# Allegro board 2019-09-21.brd
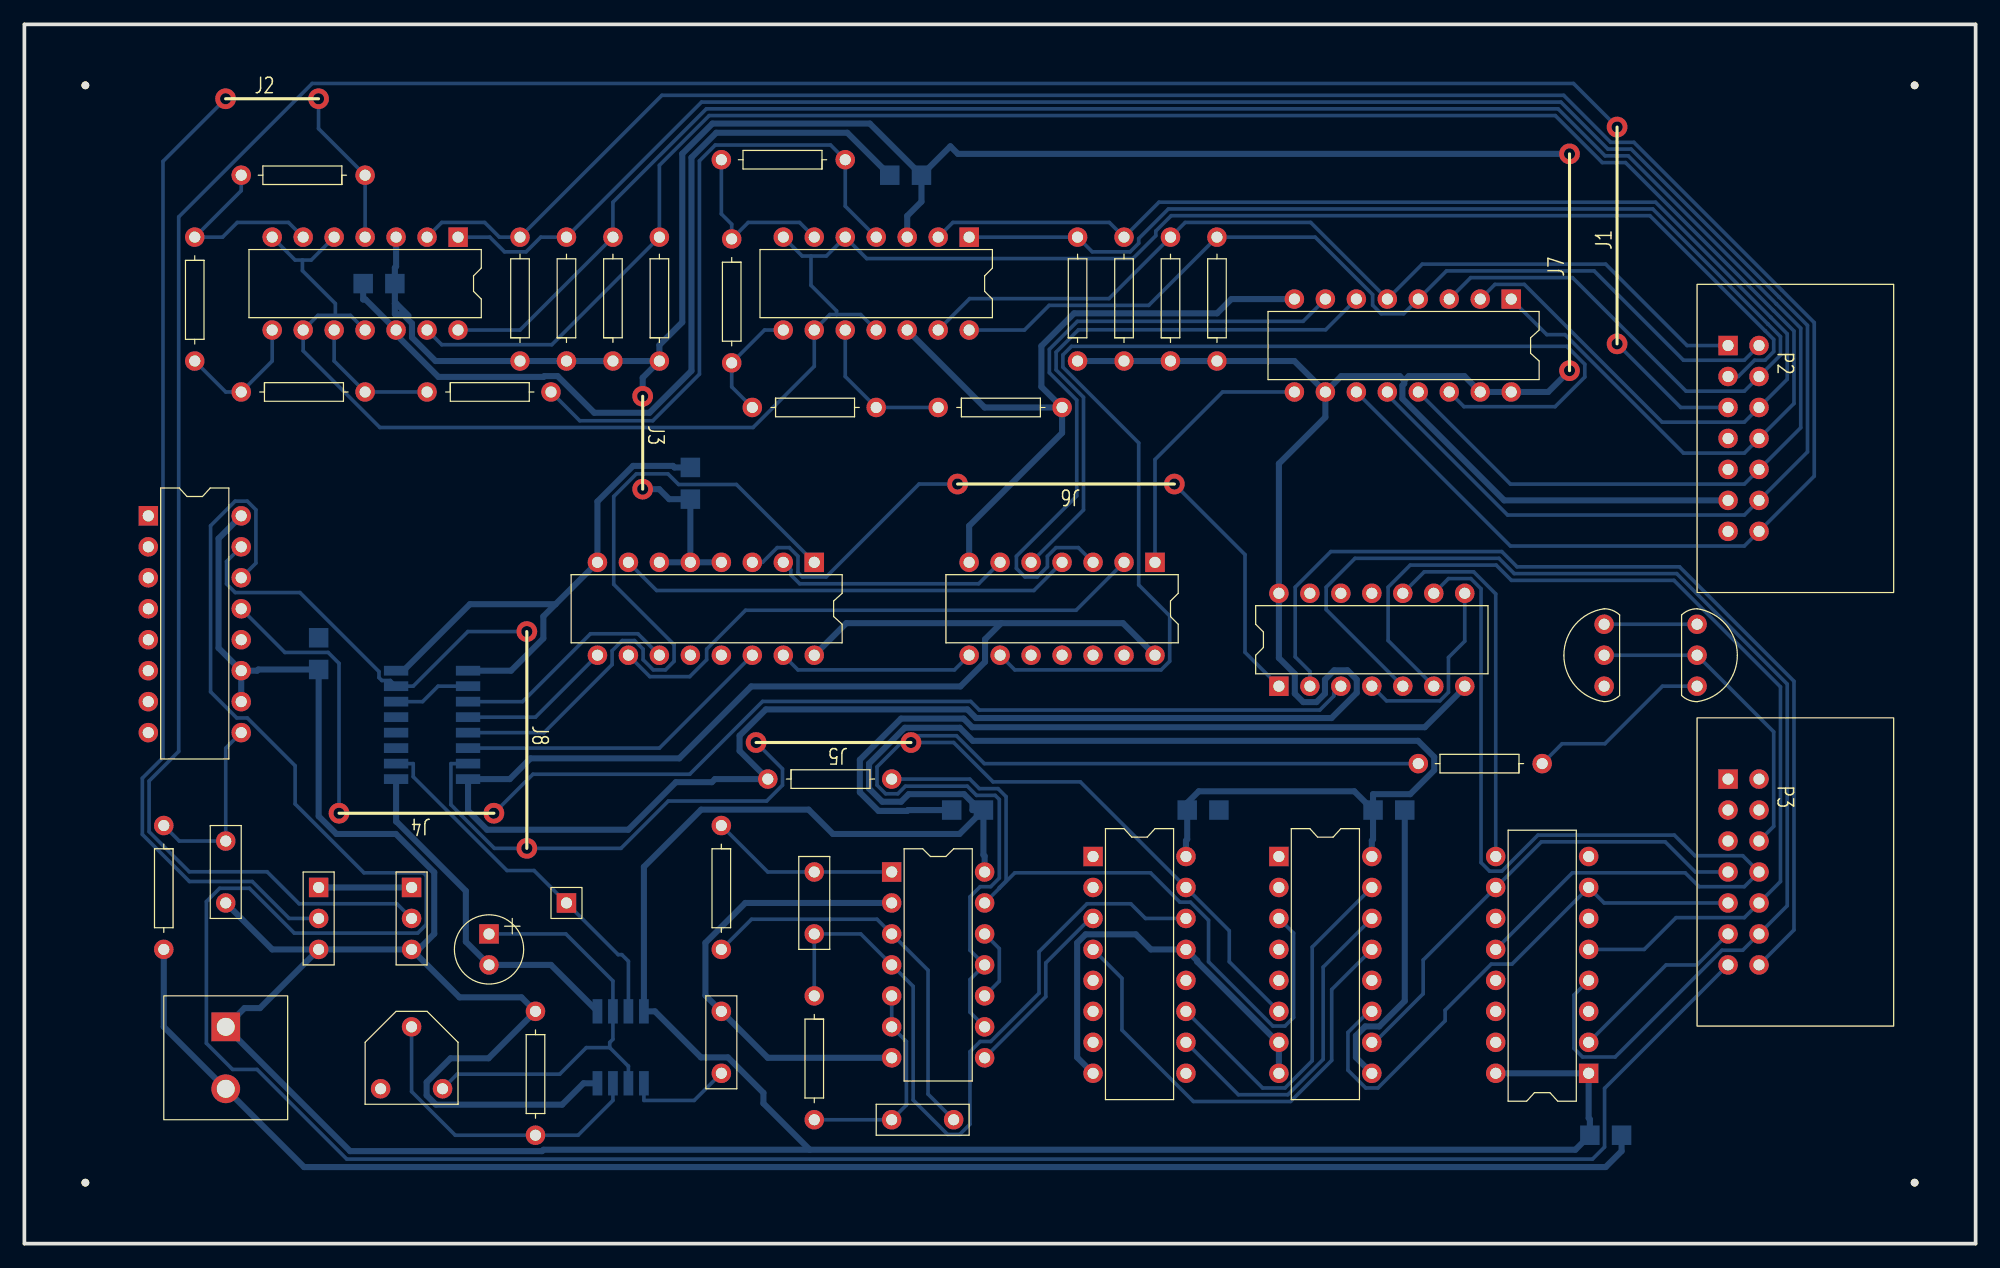
[diagram p0: board, top side]
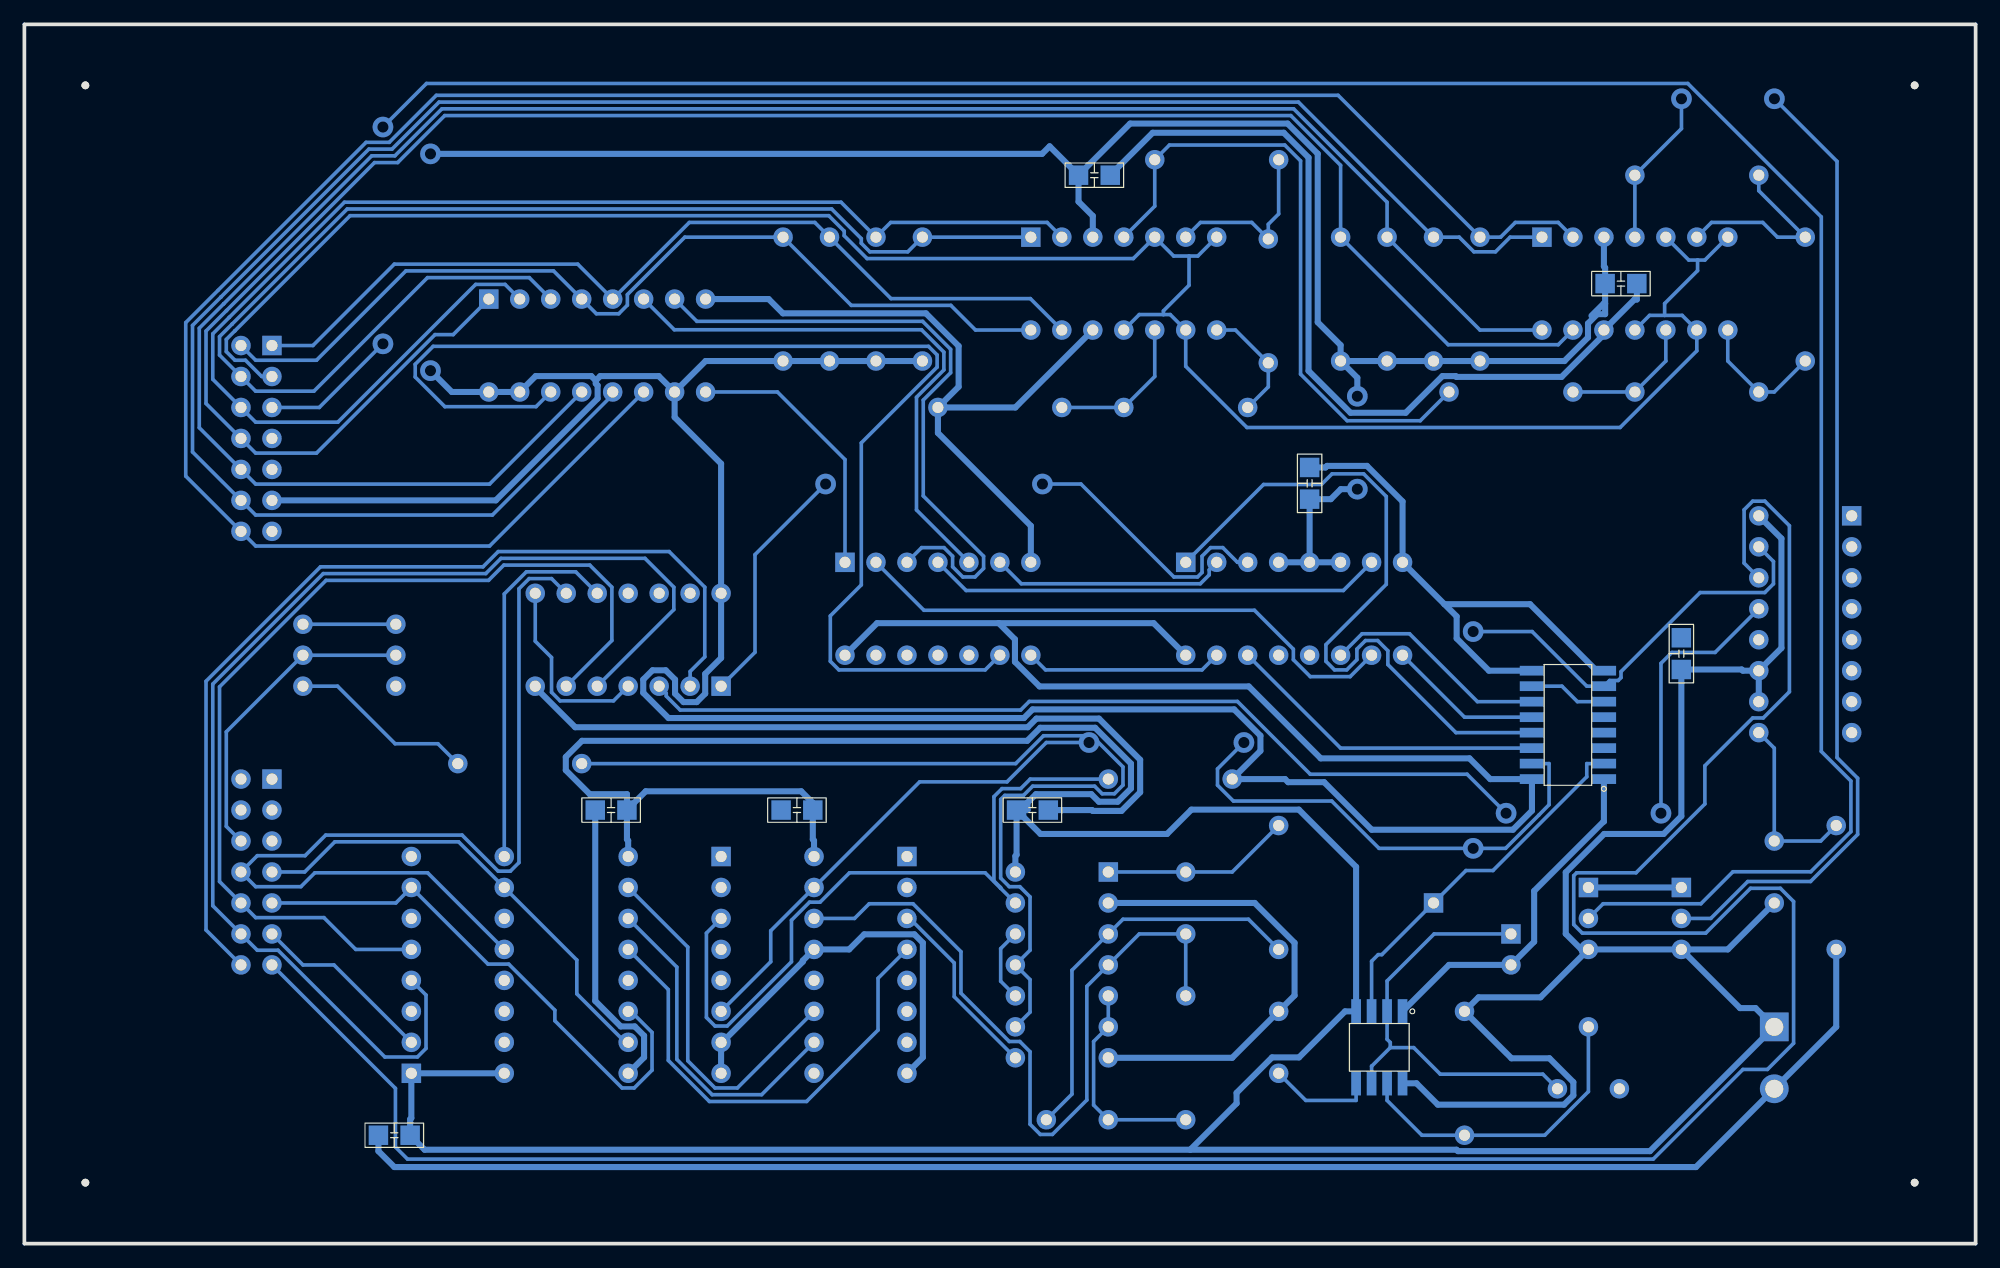
[diagram p1: board, bottom side, seen from below]

Outline 160 x 100 mm; copper layers: TOP, BOTTOM. Coordinates in mm from the lower left corner of the outline.
Outline path: 0,100 0,0 160,0 160,100 0,100

## Design rules (mm)
nets with their own width: min track width 0.5; nets +5V GND

## Placement (name value [footprint] x y rotation side)
C1  10uF  [CAP196]  38.1 25.4 0 top
C2  0.1uF  [CAP300]  57.15 13.97 90 top
C3  0.1uF  [CAP300]  16.51 27.94 90 top
C4  0.01uF  [CAP300]  64.77 30.48 270 top
C5  0.01uF  [CAP300]  76.2 10.16 180 top
C6  0.1uF  [SMDCAP]  73.66 87.63 180 bottom
C7  0.1uF  [SMDCAP]  30.48 78.74 180 bottom
C8  0.1uF  [SMDCAP]  54.61 60.96 90 bottom
C9  0.1uF  [SMDCAP]  24.13 46.99 90 bottom
C10  0.1uF  [SMDCAP]  78.74 35.56 180 bottom
C11  0.1uF  [SMDCAP]  95.25 35.56 0 bottom
C12  0.1uF  [SMDCAP]  110.49 35.56 0 bottom
C13  0.1uF  [SMDCAP]  128.27 8.89 0 bottom
J1  -  [JUMPER6]  130.6 73.8 270 bottom
J2  -  [JUMPER2]  16.5 93.9 180 bottom
J3  -  [JUMPER2]  50.7 69.5 90 bottom
J4  -  [JUMPER4]  38.5 35.3 0 bottom
J5  -  [JUMPER4]  72.7 41.1 0 bottom
J6  -  [JUMPER6]  94.3 62.3 0 bottom
J7  -  [JUMPER6]  126.7 71.6 270 bottom
J8  -  [JUMPER6]  41.2 50.2 90 bottom
NOREF  -  [unnamed]  155 95 0 top
NOREF#2  -  [unnamed]  155 5 0 top
NOREF#3  -  [unnamed]  5 95 0 top
NOREF#4  -  [unnamed]  5 5 0 top
P1  CON2  [POWER2]  16.51 17.78 270 top
P2  CON14  [JUMPER14]  139.7 73.66 270 top
P3  CON14  [JUMPER14]  139.7 38.1 270 top
Q1  2SC1815  [TO92]  137.16 50.8 270 top
Q2  2SC1815  [TO92]  129.54 45.72 90 top
R1  10K  [RES400]  41.91 19.05 180 top
R2  10K  [RES400]  27.94 87.63 90 top
R3  10K  [RES400]  13.97 82.55 180 top
R4  10K  [RES400]  17.78 69.85 270 top
R5  10K  [RES400]  33.02 69.85 270 top
R6  10K  [RES400]  67.31 88.9 90 top
R7  10K  [RES400]  58 82.4 180 top
R8  10K  [RES400]  59.69 68.58 270 top
R9  100  [RES400]  74.93 68.58 270 top
R10  4.7K  [RES400]  40.64 72.39 0 top
R11  4.7K  [RES400]  44.45 72.39 0 top
R12  4.7K  [RES400]  48.26 72.39 0 top
R13  4.7K  [RES400]  52.07 72.39 0 top
R14  4.7K  [RES400]  90.17 72.39 0 top
R15  4.7K  [RES400]  86.36 72.39 0 top
R16  4.7K  [RES400]  97.79 72.39 0 top
R17  4.7K  [RES400]  93.98 72.39 0 top
R18  680K  [RES400]  11.43 34.29 180 top
R19  10K  [RES400]  57.15 34.29 180 top
R20  10K  [RES400]  64.77 20.32 180 top
R21  10K  [RES400]  60.96 38.1 270 top
R22  1K  [RES400]  124.46 39.37 90 top
TP1  TP  [JUMPER1]  44.45 27.94 0 top
U1  NE555  [SOP8]  46.99 19.05 270 bottom
U2  LM339  [DIP14_3]  35.56 82.55 270 top
U3  LM339  [DIP14_3]  77.47 82.55 270 top
U4  40147  [DIP16_3]  121.92 77.47 270 top
U5  4069  [DIP14_3]  92.71 55.88 270 top
U6  4518  [SOP16]  30.48 38.1 0 bottom
U7  4585  [DIP16_3]  64.77 55.88 270 top
U8  4027  [DIP16_3]  10.16 59.69 0 top
U9  4071  [DIP14_3]  102.87 45.72 90 top
U10  4001  [DIP14_3]  71.12 30.48 0 top
U11  4017  [DIP16_3]  87.63 31.75 0 top
U12  4051  [DIP16_3]  102.87 31.75 0 top
U13  4175  [DIP16_3]  128.27 13.97 180 top
VR1  1M  [RESADJ]  34.29 12.7 270 top
VR2  10K  [JUMPER3]  24.13 29.21 270 top
VR3  10K  [JUMPER3]  31.75 29.21 270 top

## Library data of the parts
C1 = Cap Pol
C2-C5 = Cap NP: Tolerance: ***; User Part Number: ***
C6-C13 = Cap TEXT
J1-J8 = JUMPER
P1 = CON2
P2 P3 = CON14: User Part Number: ***
Q1 Q2 = 2SC1815
R1-R22 = resistor: Tolerance: ***; User Part Number: ***
TP1 = TP: User Part Number: ***
U1 = NE555
U2 U3 = LM339: Tolerance: ***; User Part Number: ***
U4 = 40147: Tolerance: ***; User Part Number: ***
U5 = 4069: Tolerance: ***; User Part Number: ***
U6 = 4518
U7 = 4585: Tolerance: ***; User Part Number: ***
U8 = 4027: Tolerance: ***; User Part Number: ***
U9 = 4071: Tolerance: ***; User Part Number: ***
U10 = 4001: Tolerance: ***; User Part Number: ***
U11 = 4017: Tolerance: ***; User Part Number: ***
U12 = 4051: Tolerance: ***; User Part Number: ***
U13 = 4175: Tolerance: ***; User Part Number: ***
VR1 = VR1: Tolerance: ***; User Part Number: ***
VR2 VR3 = VR2: User Part Number: ***

## Footprints (pads in the part's own frame, mm; a bottom-side part is the same pattern mirrored in y, then rotated)
CAP196
  rect 1.6x1.6 hole 0.914: 1(0,0)
  round 1.6 hole 0.91: 2(0,-2.54)
CAP300
  round 1.6 hole 0.91: 1(0,0) 2(5.08,0)
DIP14_3
  rect 1.6x1.6 hole 0.914: 1(0,0)
  round 1.6 hole 0.91: 2(0,-2.54) 3(0,-5.08) 4(0,-7.62) 5(0,-10.16) 6(0,-12.7) 7(0,-15.24) 8(7.62,-15.24) 9(7.62,-12.7) 10(7.62,-10.16) 11(7.62,-7.62) 12(7.62,-5.08) 13(7.62,-2.54) 14(7.62,0)
DIP16_3
  rect 1.6x1.6 hole 0.914: 1(0,0)
  round 1.6 hole 0.91: 2(0,-2.54) 3(0,-5.08) 4(0,-7.62) 5(0,-10.16) 6(0,-12.7) 7(0,-15.24) 8(0,-17.78) 9(7.62,-17.78) 10(7.62,-15.24) 11(7.62,-12.7) 12(7.62,-10.16) 13(7.62,-7.62) 14(7.62,-5.08) 15(7.62,-2.54) 16(7.62,0)
JUMPER1
  rect 1.6x1.6 hole 0.914: 1(0,0)
JUMPER3
  rect 1.6x1.6 hole 0.914: 1(0,0)
  round 1.6 hole 0.91: 2(2.54,0) 3(5.08,0)
JUMPER14
  rect 1.6x1.6 hole 0.914: 1(0,0)
  round 1.6 hole 0.91: 2(0,2.54) 3(2.54,0) 4(2.54,2.54) 5(5.08,0) 6(5.08,2.54) 7(7.62,0) 8(7.62,2.54) 9(10.16,0) 10(10.16,2.54) 11(12.7,0) 12(12.7,2.54) 13(15.24,0) 14(15.24,2.54)
POWER2
  rect 2.362x2.362 hole 1.473: 1(0,0)
  round 2.362 hole 1.473: 2(5.08,0)
RES400
  round 1.6 hole 0.91: 1(0,0) 2(0,10.16)
RESADJ
  round 1.6 hole 0.91: 1(0,0) 2(-5.08,-2.54) 3(0,-5.08)
SMDCAP
  rect 1.6x1.6 smd: 1(0.1,0) 2(2.7,0)
SOP8
  rect 2x0.8 smd: 1(0,0) 2(0,-1.27) 3(0,-2.54) 4(0,-3.81) 5(5.9,-3.81) 6(5.9,-2.54) 7(5.9,-1.27) 8(5.9,0)
SOP16
  rect 2x0.8 smd: 1(0,0) 2(0,-1.27) 3(0,-2.54) 4(0,-3.81) 5(0,-5.08) 6(0,-6.35) 7(0,-7.62) 8(0,-8.89) 9(5.9,-8.89) 10(5.9,-7.62) 11(5.9,-6.35) 12(5.9,-5.08) 13(5.9,-3.81) 14(5.9,-2.54) 15(5.9,-1.27) 16(5.9,0)
TO92
  round 1.6 hole 0.91: 1(0,0) 2(2.54,0) 3(5.08,0)
unnamed
  round 0.635 hole 3.175 unplated: (0,0)

## Nets
+5V: C3.1 C6.1 C7.1 C8.1 C9.1 C10.1 C11.1 C12.1 C13.1 P1.1 P2.11 R1.1 R10.1 R11.1 R12.1 R13.1 R14.1 R15.1 R16.1 R17.1 R21.1 U1.4(RST) U1.8(VCC) U2.3 U3.3 U4.10(I\9\) U4.15(I\0\) U4.16(VCC) U5.14 U6.16 U7.4(A>BIN) U7.5(A<BIN) U7.6(A=BIN) U7.16(VCC) U8.10(J) U8.11(K) U8.16 U9.14 U10.14 U11.16(VCC) U12.16(VCC) U13.1(R\S\T\) U13.16(VCC) VR2.3(A) VR3.3(A)
GND: C1.2 C2.2 C6.2 C7.2 C8.2 C9.2 C10.2 C11.2 C12.2 C13.2 P1.2 P2.13 Q2.1(B) R9.2 R18.2 U1.1(GND) U2.12 U3.12 U4.8(GND) U5.7 U6.1(CLK) U6.8 U6.9(CLK) U7.8(GND) U8.8 U8.12(RST) U9.7 U10.2(I1) U10.7 U11.8(GND) U11.13(C\K\E\N\) U12.7(VEE) U12.8(GND) U12.9(C) U13.8(GND) VR2.1(WIPER) VR3.1(WIPER)
AD0: P2.14 R10.2 U2.2(OUT) U4.11(I\1\)
AD1: P2.12 R11.2 U2.1(OUT) U4.12(I\2\)
AD2: P2.10 R12.2 U2.14(OUT) U4.13(I\3\)
AD3: P2.8 R13.2 U2.13(OUT) U4.1(I\4\)
AD4: P2.6 R14.2 U3.2(OUT) U4.2(I\5\)
AD5: P2.4 R15.2 U3.1(OUT) U4.3(I\6\)
AD6: P2.2 R16.2 U3.14(OUT) U4.4(I\7\)
AD7: P2.1 R17.2 U3.13(OUT) U4.5(I\8\)
CLK: TP1.1 U1.3(OUT) U6.2(EN)
MOTOR-GND: P3.6 Q1.2(C) Q2.2(C)
MR: U6.7(CLR) U6.15(CLR) U8.15(Q) U11.15(RST) U12.6(E\N\)
MR2: P3.13 U8.14(Q\)
SW1: P3.14 U9.2(I1)
SW2: P3.12 U9.5(I0) U13.4(D0)
SW3: P3.10 U9.6(I1) U13.5(D1)
SW4: P3.8 U9.9(I1) U13.12(D2)
SWLED1: P3.11 U13.2(Q0)
SWLED2: P3.9 U12.11(A) U13.7(Q1)
SWLED3: P3.7 U12.10(B) U13.10(Q2)
VR3: P2.5 VR3.2(B)
VR-LED: P2.3 U2.5(+IN) U2.7(+IN) U2.9(+IN) U2.11(+IN) U3.5(+IN) U3.7(+IN) U3.9(+IN) U3.11(+IN)
N01171: R2.1 U2.4(-IN) VR2.2(B)
N01178: R2.2 R3.1 U2.6(-IN)
N01236: R3.2 R4.1 U2.8(-IN)
N01299: R4.2 R5.1 U2.10(-IN)
N01438: R5.2 R6.1 U3.4(-IN)
N01501: R6.2 R7.1 U3.6(-IN)
N01564: R7.2 R8.1 U3.8(-IN)
N01627: R8.2 R9.1 U3.10(-IN)
N02984: U4.9(A\) U5.1(I)
N02988: U4.7(B\) U5.3(I)
N02997: U4.6(C\) U5.5(I)
N03009: U4.14(D\) U5.9(I)
N03021: U5.8(O) U7.15(A3)
N03028: U5.6(O) U7.2(A2)
N03040: U5.4(O) U7.7(A1)
N03052: U5.2(O) U7.10(A0)
N03089: U6.11(Q0) U7.11(B0)
N03091: U6.12(Q1) U7.9(B1)
N03093: U6.13(Q2) U7.1(B2)
N03095: U6.14(Q3) U7.14(B3)
N03116: U6.6(Q3) U6.10(EN)
N03269: U7.3(A=BOUT) U9.1(I0)
N03306: U8.13(CLK) U9.3(O)
N03506: C3.2 R18.1 U8.9(SET)
N03534: R1.2 U1.7(DISC) VR1.2
N03538: C1.1 U1.2(TRIG) U1.6(THR) VR1.1
N03582: C2.1 U1.5(CV)
N07723: C5.1 R19.2 U10.3(O)
N07737: C5.2 R20.2 U10.5(I0) U10.6(I1)
N07794: C4.1 R19.1 U10.1(I0)
N07816: C4.2 R20.1 U10.4(O) U11.14(CLK)
N07935: U10.8(I0) U11.3(0)
N07959: U11.11(9) U12.15(X2)
N07975: U11.4(2) U12.13(X0)
N07987: U11.10(4) U12.14(X1)
N08006: R21.2 U10.13(I1) U12.3(X)
N08038: U9.4(O) U9.8(I0)
N08042: U9.10(O) U13.9(CLK)
N08070: R22.2 U10.9(I1) U10.11(O)
N08085: U10.10(O) U10.12(I0)
N08179: Q1.3(E) R22.1
N08183: Q1.1(B) Q2.3(E)

Pads without a net: P2 7 9; P3 1 2 3 4 5; U5 10 11 12 13; U6 3 4 5; U7 12 13; U8 1 2 3 4 5 6 7; U9 11 12 13; U11 1 2 5 6 7 9 12; U12 1 2 4 5 12; U13 3 6 11 13 14 15; VR1 3

## Via types
v1: diameter 1.7, hole 0.91, TOP to BOTTOM, 16 vias

## Routing (per net, layer and track width the routed paths; a pad name or vN(x,y) marks a point on that pad's centre or on a via; arc(x,y) is an arc through that point)
+5V: length 839.2
  BOTTOM w0.5: U4.10 104.14,72.39 R16.1 R17.1 R14.1 R15.1 ; U4.10 107.98,71.15 112.78,71.15 113.15,70.79 ; U4.10 106.68,67.78 102.87,63.97 U9.14 102.87,48.03 104.17,46.73 104.17,45.11 104.87,44.42 105.95,44.42 106.65,45.11 106.65,46.26 107.41,47.02 108.49,47.02 109.25,46.26 109.25,45.18 107.18,43.11 78.03,43.11 77.33,43.82 60.8,43.82 58.65,41.66 58.65,40.41 R21.1 56.62,38.1 56.37,37.85 53.42,37.85 49.52,33.95 37.94,33.95 36.38,35.51 U6.16 39.8,38.1 41.5,39.8 53.7,39.8 59.6,45.7 76.75,45.7 78.77,47.72 78.77,49.56 80.1,50.89 ; U7.16 67.4,50.89 80.1,50.89 ; 113.15,70.79 113.15,70.54 113,70.39 113,69.31 121.34,60.96 P2.11 ; 113.15,70.79 113.51,71.15 118.08,71.15 U4.15 U4.16 124.95,69.85 v1(126.7,71.6) ; C3.1 20.32,24.13 VR2.3 ; R13.1 50.7,71.02 v1(50.7,69.5) ; R13.1 R12.1 R11.1 R10.1 33.72,72.39 31.78,74.32 31.78,75.47 31.02,76.23 30.38,76.23 30.38,77.1 ; R13.1 52.07,73.69 53.95,75.57 53.95,89.39 56.42,91.87 69.32,91.87 C6.1 ; 64.4,7.7 60.6,11.5 60.6,12.37 57.69,15.27 55.48,15.27 51.7,19.05 U1.4 50.8,30.9 55.49,35.59 64.31,35.59 66.3,33.6 76.68,33.6 C10.1 ; 64.4,7.7 127.18,7.7 C13.1 128.37,10.19 128.27,10.29 U13.1 U13.16 ; 64.4,7.7 42.56,7.7 42.45,7.59 26.7,7.59 P1.1 18.05,19.32 19.32,19.32 VR2.3 ; C6.1 75.93,90 76.55,89.38 v1(126.7,89.38) ; C6.1 73.56,85.46 72.39,84.29 U3.3 ; C12.1 110.59,33.15 110.49,33.05 U12.16 ; C12.1 109.05,37.1 96.3,37.1 95.35,36.15 C11.1 95.35,33.15 95.25,33.05 U11.16 ; C12.1 110.59,36.86 113.64,36.86 115.6,38.83 115.6,39.91 114.28,41.24 77.77,41.24 76.7,42.31 72.2,42.31 69.26,39.37 69.26,37.33 70.35,36.24 71.89,36.24 72.51,36.86 77.05,36.86 77.74,36.17 77.74,35.56 C10.1 ; U7.5 U7.4 ; U7.5 C8.1 52.87,61.06 52.05,61.88 v1(50.7,61.88) ; U7.5 U7.6 ; U1.8 45.85,13.15 44.1,11.4 33.75,11.4 32.99,12.16 32.99,13.24 34.95,15.2 38.06,15.2 R1.1 40.76,20.2 35.68,20.2 VR3.3 ; 80.1,50.89 90.08,50.89 U5.14 ; U8.11 19.08,46.99 19.18,47.09 C9.1 24.13,35.05 25.59,33.6 30.46,33.6 33.61,30.45 33.61,25.41 32.33,24.13 VR3.3 ; U8.11 15.92,48.85 15.92,57.83 U8.16 ; U8.11 U8.10 ; VR3.3 VR2.3 ; 30.38,77.1 30.5,77.1 31.5,76.1 ; 30.38,77.1 C7.1 30.38,80.04 30.48,80.14 U2.3 ; C10.1 78.64,31.88 78.74,31.78 U10.14
GND: length 503.4
  BOTTOM w0.5: U1.1 43.18,22.86 C1.2 36.2,24.76 36.2,28.92 30.5,34.62 30.48,34.62 U6.1 ; U3.12 78.74,68.58 R9.2 ; U6.9 39.91,46.99 42.55,49.64 42.55,51.44 43.55,52.45 ; U5.7 77.47,58.87 85.09,66.49 R9.2 ; VR3.1 VR2.1 ; U12.9 109.19,15.27 109.19,17.05 109.95,17.81 111.1,17.81 113.19,19.91 C12.2 ; R18.2 11.43,17.78 P1.2 22.93,6.28 129.66,6.28 130.97,7.59 C13.2 ; 43.55,52.45 36.53,52.45 31.08,46.99 U6.8 ; 43.55,52.45 U7.8 46.99,60.87 49.91,63.79 53.18,63.79 53.31,63.66 C8.2 ; U10.7 60.96,15.24 C2.2 55.85,20.35 55.85,24.67 59.12,27.94 U10.2 ; C6.2 67.48,91.11 56.73,91.11 54.7,89.08 54.7,71.58 51.26,68.15 46.73,68.15 43.72,71.15 42.64,71.15 42.57,71.09 33.95,71.09 30.48,74.56 U2.12 27.97,77.44 27.78,77.44 C7.2 ; R9.2 83.39,70.28 83.39,73.62 86.07,76.3 97.8,76.3 98.97,77.47 U4.8 ; U9.7 118.11,45.63 114.83,42.35 77.72,42.35 77.01,43.06 71.89,43.06 68.51,39.68 68.51,37.02 70.04,35.49 72.39,35.49 72.46,35.56 C10.2 ; U12.8 U12.7 102.78,16.51 96.17,23.12 96.17,23.21 U11.13 92.37,24.13 91.13,25.37 87.02,25.37 86.33,24.67 86.33,15.27 U11.8
AD0: length 185
  BOTTOM w0.3: U4.11 121.85,57.22 141.04,57.22 P2.14 146.77,62.95 146.77,75.54 144.12,78.19 131.98,90.33 130.08,90.33 126.22,94.18 52.27,94.18 R10.2 38.95,82.55 37.75,83.75 34.22,83.75 U2.2
AD1: length 175.1
  BOTTOM w0.3: U2.1 38.17,82.55 39.37,81.35 41.14,81.35 42.34,82.55 R11.2 55.53,93.63 125.99,93.63 129.85,89.77 131.75,89.77 143.89,77.63 146.21,75.31 146.21,64.93 P2.12 141.04,59.76 121.62,59.76 111.76,69.62 U4.12
AD2: length 171.3
  BOTTOM w0.3: U4.13 121.85,62.3 141.04,62.3 P2.10 145.66,66.92 145.66,75.08 143.66,77.08 143.66,77.08 131.52,89.22 129.62,89.22 125.76,93.07 55.92,93.07 48.26,85.41 R12.2 40.64,74.93 U2.14
AD3: length 167.2
  BOTTOM w0.3: U4.1 124.84,74.55 126.33,74.55 136.05,64.84 141.04,64.84 P2.8 145.11,68.91 145.11,74.85 143.43,76.53 131.29,88.66 129.39,88.66 125.53,92.52 56.15,92.52 52.07,88.44 R13.2 43.25,73.73 34.22,73.73 U2.13
AD4: length 111.8
  BOTTOM w0.3: U3.2 76.13,83.75 88.97,83.75 R14.2 93.04,85.42 133.75,85.42 143.2,75.97 143.2,75.97 144.55,74.62 144.55,70.89 P2.6 141.04,67.38 134.29,67.38 122.99,78.67 120.58,78.67 U4.2
AD5: length 107.5
  BOTTOM w0.3: U3.1 R15.2 87.56,81.35 90.67,81.35 91.37,82.05 91.37,82.43 93.81,84.86 133.52,84.86 142.97,75.42 144,74.39 144,72.88 P2.4 141.04,69.92 136.26,69.92 126.95,79.23 118.6,79.23 U4.3
AD6: length 76
  BOTTOM w0.3: U3.14 82,74.93 84.03,76.95 92.19,76.95 R16.2 105.84,82.55 110.56,77.84 110.56,76.97 111.26,76.27 113.1,76.27 U4.4 116.61,79.78 128.72,79.78 136.04,72.46 141.04,72.46 P2.2
AD7: length 75
  BOTTOM w0.3: P2.1 136.34,73.66 129.66,80.34 114.63,80.34 U4.5 105.48,83.75 95.18,83.75 R17.2 88.94,77.51 77.51,77.51 U3.13
CLK: length 30.5
  BOTTOM w0.3: U1.3 49.53,23.16 48.99,23.7 48.69,23.7 TP1.1 41.79,30.6 39.58,30.6 31.88,38.29 31.88,39.37 U6.2
MOTOR-GND: length 26
  BOTTOM w0.3: P3.6 143.44,34.22 143.44,41.98 Q1.2 Q2.2
MR: length 114.6
  BOTTOM w0.3: v1(60,41.1) 62.16,38.94 62.16,37.6 60.86,36.3 52.8,36.3 48.92,32.42 v1(41.2,32.42) 38.54,32.42 35.81,35.15 34.98,36 34.98,39.37 U6.15 ; v1(41.2,50.2) 36.36,50.2 31.88,45.72 U6.7 30.01,46.19 29.31,46.19 29.08,46.42 29.08,46.92 22.59,53.4 17.29,53.4 16.58,54.11 16.58,55.95 U8.15 ; v1(72.7,41.1) 76.2,41.1 79.43,37.87 86.59,37.87 U11.15 98.8,25.66 98.8,23.12 U12.6
MR2: length 224.4
  BOTTOM w0.3: U8.14 18.98,55.81 18.98,60.19 18.28,60.89 17.28,60.89 15.27,58.88 15.27,45.26 17.41,43.11 18.28,43.11 22.2,39.19 22.2,36.06 27.85,30.41 32.72,30.41 32.95,30.18 32.95,26.17 32.25,25.47 22.13,25.47 18.46,29.14 16.01,29.14 14.93,28.06 14.93,16.43 17.07,14.29 19.08,14.29 26.43,6.93 128.58,6.93 129.57,7.92 129.57,12.73 P3.13
SW1: length 79.6
  BOTTOM w0.3: P3.14 145.11,25.73 145.11,46.12 135.72,55.51 122.4,55.51 121.15,56.76 107.13,56.76 104.21,53.84 104.21,48.13 105.41,46.92 U9.2
SW2: length 101
  BOTTOM w0.3: U9.5 106.75,52 106.75,53.84 109.11,56.21 120.92,56.21 122.17,54.95 135.49,54.95 144.55,45.9 144.55,27.71 P3.12 140.9,24.06 139.2,24.06 130.44,15.31 127.77,15.31 127.07,16.01 127.07,20.39 U13.4
SW3: length 80.7
  BOTTOM w0.3: U9.6 111.83,49.46 111.83,53.84 113.64,55.65 120.69,55.65 121.94,54.4 135.26,54.4 144,45.66 144,29.7 P3.10 141.04,26.74 135.44,26.74 132.83,24.13 U13.5
SW4: length 77.9
  BOTTOM w0.3: U9.9 116.77,54.54 118.61,54.54 119.45,53.71 119.45,31.25 120.15,30.55 121.15,30.55 124.11,33.51 135.29,33.51 136.98,31.82 140.9,31.82 P3.8 141.04,29.28 137.32,29.28 136.19,30.41 126.93,30.41 U13.12
SWLED1: length 15.1
  BOTTOM w0.3: U13.2 134.61,22.85 137.15,22.85 P3.11
SWLED2: length 45.4
  BOTTOM w0.3: U12.11 110.26,19.05 108.53,17.32 108.53,14.22 109.99,12.77 110.99,12.77 116.5,18.28 116.5,19.14 120.28,22.93 121.99,22.93 U13.7 129.54,27.94 P3.9
SWLED3: length 38.7
  BOTTOM w0.3: U12.10 110.72,16.51 114.7,20.49 114.7,23.26 U13.10 124.39,32.95 134.55,32.95 137.02,30.48 P3.7
VR3: length 211.1
  BOTTOM w0.3: v1(130.6,91.58) 127.03,95.15 23.6,95.15 12.65,84.21 12.65,40.37 10.23,37.94 10.23,33.79 13.52,30.5 19.9,30.5 22.53,27.87 30.55,27.87 VR3.2 ; v1(130.6,73.8) 135.82,68.58 P2.5
VR-LED: length 176.1
  BOTTOM w0.3: P2.3 140.54,71.12 141.87,72.46 142.74,72.46 143.44,73.16 143.44,74.16 142.74,74.86 142.74,74.86 133.29,84.31 94.03,84.31 92.78,83.05 92.78,82.67 90.9,80.79 69.07,80.79 U3.5 65.76,81 64.5,81 ; 22.8,80.67 22.8,79.8 25.5,77.1 25.5,76.13 ; 22.8,80.67 23.52,80.67 U2.5 ; 22.8,80.67 22.2,80.67 U2.7 ; 25.5,76.13 26.74,76.13 U2.11 ; 25.5,76.13 24.06,76.13 U2.9 22.86,73.23 29.15,66.94 59.75,66.94 64.77,71.96 U3.9 66.04,76.2 66.6,76.2 ; 66.6,76.2 66.6,76.5 64.5,78.6 64.5,81 ; 66.6,76.2 68.58,76.2 U3.11 ; 64.5,81 63.78,81 U3.7
N01171: length 93.4
  BOTTOM w0.3: U2.4 R2.1 24.12,91.45 v1(24.12,93.9) ; VR2.2 21.71,26.67 18.69,29.7 13.54,29.7 9.67,33.56 9.67,38.17 11.36,39.86 11.36,88.76 v1(16.5,93.9)
N01178: length 16.5
  BOTTOM w0.3: R2.2 17.78,86.36 R3.1 16.25,82.55 17.45,83.75 21.66,83.75 U2.6
N01236: length 11
  BOTTOM w0.3: R3.2 16.51,69.85 R4.1 20.32,72.39 U2.8
N01299: length 11.2
  BOTTOM w0.3: U2.10 25.4,72.39 R4.2 R5.1
N01438: length 52.6
  BOTTOM w0.3: U3.4 67.31,85.09 R6.1 66.11,90.1 56.65,90.1 55.35,88.81 55.35,71.31 51.53,67.49 45.54,67.49 R5.2
N01501: length 14.7
  BOTTOM w0.3: R6.2 57.15,84.45 58,83.6 R7.1 59.35,83.75 63.57,83.75 U3.6
N01564: length 9.7
  BOTTOM w0.3: R8.1 58,70.27 R7.2 60.69,74.93 U3.8
N01627: length 12.5
  BOTTOM w0.3: R9.1 R8.2 67.31,71.12 U3.10
N02984: length 22.2
  BOTTOM w0.3: U5.1 92.71,64.31 98.25,69.85 U4.9
N02988: length 53.9
  BOTTOM w0.3: U5.3 86.43,57.08 84.59,57.08 83.89,56.38 83.89,55.51 83.05,54.68 82.05,54.68 81.35,55.38 81.35,56.38 86.29,61.33 86.29,69.18 84.05,71.43 84.05,73.35 86.34,75.64 104.86,75.64 U4.7
N02997: length 46.4
  BOTTOM w0.3: U4.6 106.7,74.95 86.44,74.95 84.6,73.12 84.6,71.66 86.85,69.42 86.85,60.18 U5.5
N03009: length 100.8
  BOTTOM w0.3: U4.14 118.04,68.65 125.52,68.65 127.95,71.08 127.95,72.12 126.48,73.59 85.86,73.59 85.16,72.89 85.16,71.89 91.37,65.67 91.37,54.03 93.91,51.49 93.91,47.76 93.21,47.06 81.21,47.06 U5.9
N03021: length 16.2
  BOTTOM w0.3: U5.8 76.27,47.06 63.43,47.06 U7.15
N03028: length 19.5
  BOTTOM w0.3: U7.2 62.85,55.26 62.85,54.85 63.57,54.12 78.25,54.12 U5.6
N03040: length 37.5
  BOTTOM w0.3: U5.4 82.78,53.57 51.84,53.57 U7.7
N03052: length 45.8
  BOTTOM w0.3: U7.10 51.29,46.5 54.55,46.5 55.95,47.89 55.95,48.76 59.13,51.95 86.24,51.95 U5.2
N03089: length 18.7
  BOTTOM w0.3: U7.11 50.31,50.02 46.42,50.02 40.85,44.45 U6.11
N03091: length 12.7
  BOTTOM w0.3: U7.9 41.91,43.18 U6.12
N03093: length 58.3
  BOTTOM w0.3: U7.1 58.39,62.26 53.64,62.26 52.77,63.13 50.18,63.13 48.33,61.28 48.33,54.07 53.27,49.13 53.27,47.76 52.57,47.06 51.57,47.06 50.73,47.89 50.73,48.76 50.03,49.46 49.03,49.46 48.19,48.63 48.19,47.49 42.61,41.91 U6.13
N03095: length 26.5
  BOTTOM w0.3: U7.14 52.07,40.64 U6.14
N03116: length 6.4
  BOTTOM w0.3: U6.6 32.65,44.45 33.92,45.72 U6.10
N03269: length 42.4
  BOTTOM w0.3: v1(94.3,62.3) 100.09,56.51 100.09,48.5 U9.1 ; v1(76.52,62.3) 73.36,62.3 65.74,54.68 63.8,54.68 63.43,55.04 63.43,56.38 62.73,57.08 61.73,57.08 60.53,55.88 U7.3
N03306: length 96.7
  BOTTOM w0.3: U8.13 21.36,48.49 24.91,48.49 25.8,47.59 v1(25.8,35.3) ; v1(38.5,35.3) 41.7,38.5 54.56,38.5 60.53,44.47 77.6,44.47 78.31,43.76 106.22,43.76 107.37,44.91 107.37,45.14 U9.3
N03506: length 15
  BOTTOM w0.3: R18.1 12.7,33.02 C3.2 16.51,40.64 U8.9
N03534: length 25.9
  BOTTOM w0.3: VR1.2 31.75,12.47 35.33,8.89 R1.2 45.4,8.89 48.26,11.75 U1.7
N03538: length 36
  BOTTOM w0.3: 48,16.07 48,16.5 48.26,16.76 U1.2 48.26,21.54 44.4,25.4 C1.1 ; 48,16.07 46.08,16.07 43.9,13.9 35.49,13.9 VR1.1 ; 48,16.07 49.52,14.55 49.53,14.55 U1.6
N03582: length 8.7
  BOTTOM w0.3: C2.1 54.93,11.75 50.8,11.75 U1.5
N07723: length 32.8
  BOTTOM w0.3: C5.1 74.1,12.26 74.1,22.42 U10.3 69.92,26.6 59.62,26.6 R19.2
N07737: length 17.5
  BOTTOM w0.3: R20.2 C5.2 72.32,11.36 72.32,16.58 U10.6 U10.5
N07794: length 15.5
  BOTTOM w0.3: R19.1 60.96,30.48 C4.1 U10.1
N07816: length 61.6
  BOTTOM w0.3: U11.14 91.93,26.67 90.73,27.87 87.13,27.87 83.2,23.94 83.2,20.54 79.24,16.58 78.37,16.58 77.54,15.74 77.54,9.79 76.7,8.96 75.7,8.96 72.88,11.78 72.88,21.1 U10.4 68.58,25.4 C4.2 R20.1
N07935: length 15.2
  BOTTOM w0.3: U11.3 87.4,26.67 83.75,23.02 83.75,20.25 U10.8
N07959: length 30.1
  BOTTOM w0.3: U12.15 105.6,24.32 105.6,15 103.37,12.77 101.53,12.77 U11.11
N07975: length 39.1
  BOTTOM w0.3: U11.4 90,21.76 90,17.52 95.86,11.66 103.83,11.66 107.2,15.03 107.2,20.84 U12.13
N07987: length 27.4
  BOTTOM w0.3: U11.10 99.55,12.21 103.6,12.21 106.5,15.11 106.5,22.68 U12.14
N08006: length 60.2
  BOTTOM w0.3: R21.2 77.52,38.1 78.3,37.32 79.84,37.32 80.5,36.66 80.5,29.75 79.95,29.2 79.95,29.15 ; 79.95,29.15 81.21,30.41 92.34,30.41 94.75,28.01 95.62,28.01 97.1,26.52 97.1,23.12 102.37,17.85 103.37,17.85 104.07,18.55 104.07,25.47 U12.3 ; 79.95,29.15 U10.13
N08038: length 15.7
  BOTTOM w0.3: U9.8 118.11,49.41 116.77,48.07 116.77,45.22 116.07,44.52 111.69,44.52 U9.4
N08042: length 30.6
  BOTTOM w0.3: U9.10 114.79,55.1 118.84,55.1 120.65,53.29 U13.9
N08070: length 80.6
  BOTTOM w0.3: R22.2 78.71,39.37 76.43,41.65 72.47,41.65 69.92,39.1 69.92,37.6 70.62,36.9 71.62,36.9 72.24,37.52 77.32,37.52 78.07,36.76 79.61,36.76 79.94,36.43 79.94,29.98 79.24,29.28 78.37,29.28 77.54,28.44 77.54,24.06 U10.11 77.54,21.66 77.54,18.98 U10.9
N08085: length 6.1
  BOTTOM w0.3: U10.12 79.94,24.2 79.94,21.52 U10.10
N08179: length 15.3
  BOTTOM w0.3: R22.1 126.09,41 129.6,41 134.32,45.72 Q1.3
N08183: length 7.6
  BOTTOM w0.3: Q1.1 Q2.3
